# Altium PCB Mini-Rambo.PcbDoc (part 1 of 3)
Units mil, origin at the board's own origin, x right, y up, seen from the top; angles counter-clockwise.
Board outline 4133.86 x 2795.28 mil, 4 copper layers (Top, GND, Supply, Bottom), stack 61.811 mil thick; 295 components, 208 nets, 992 pads, 488 vias.
Unrouted connection lines stored in the file: 73.
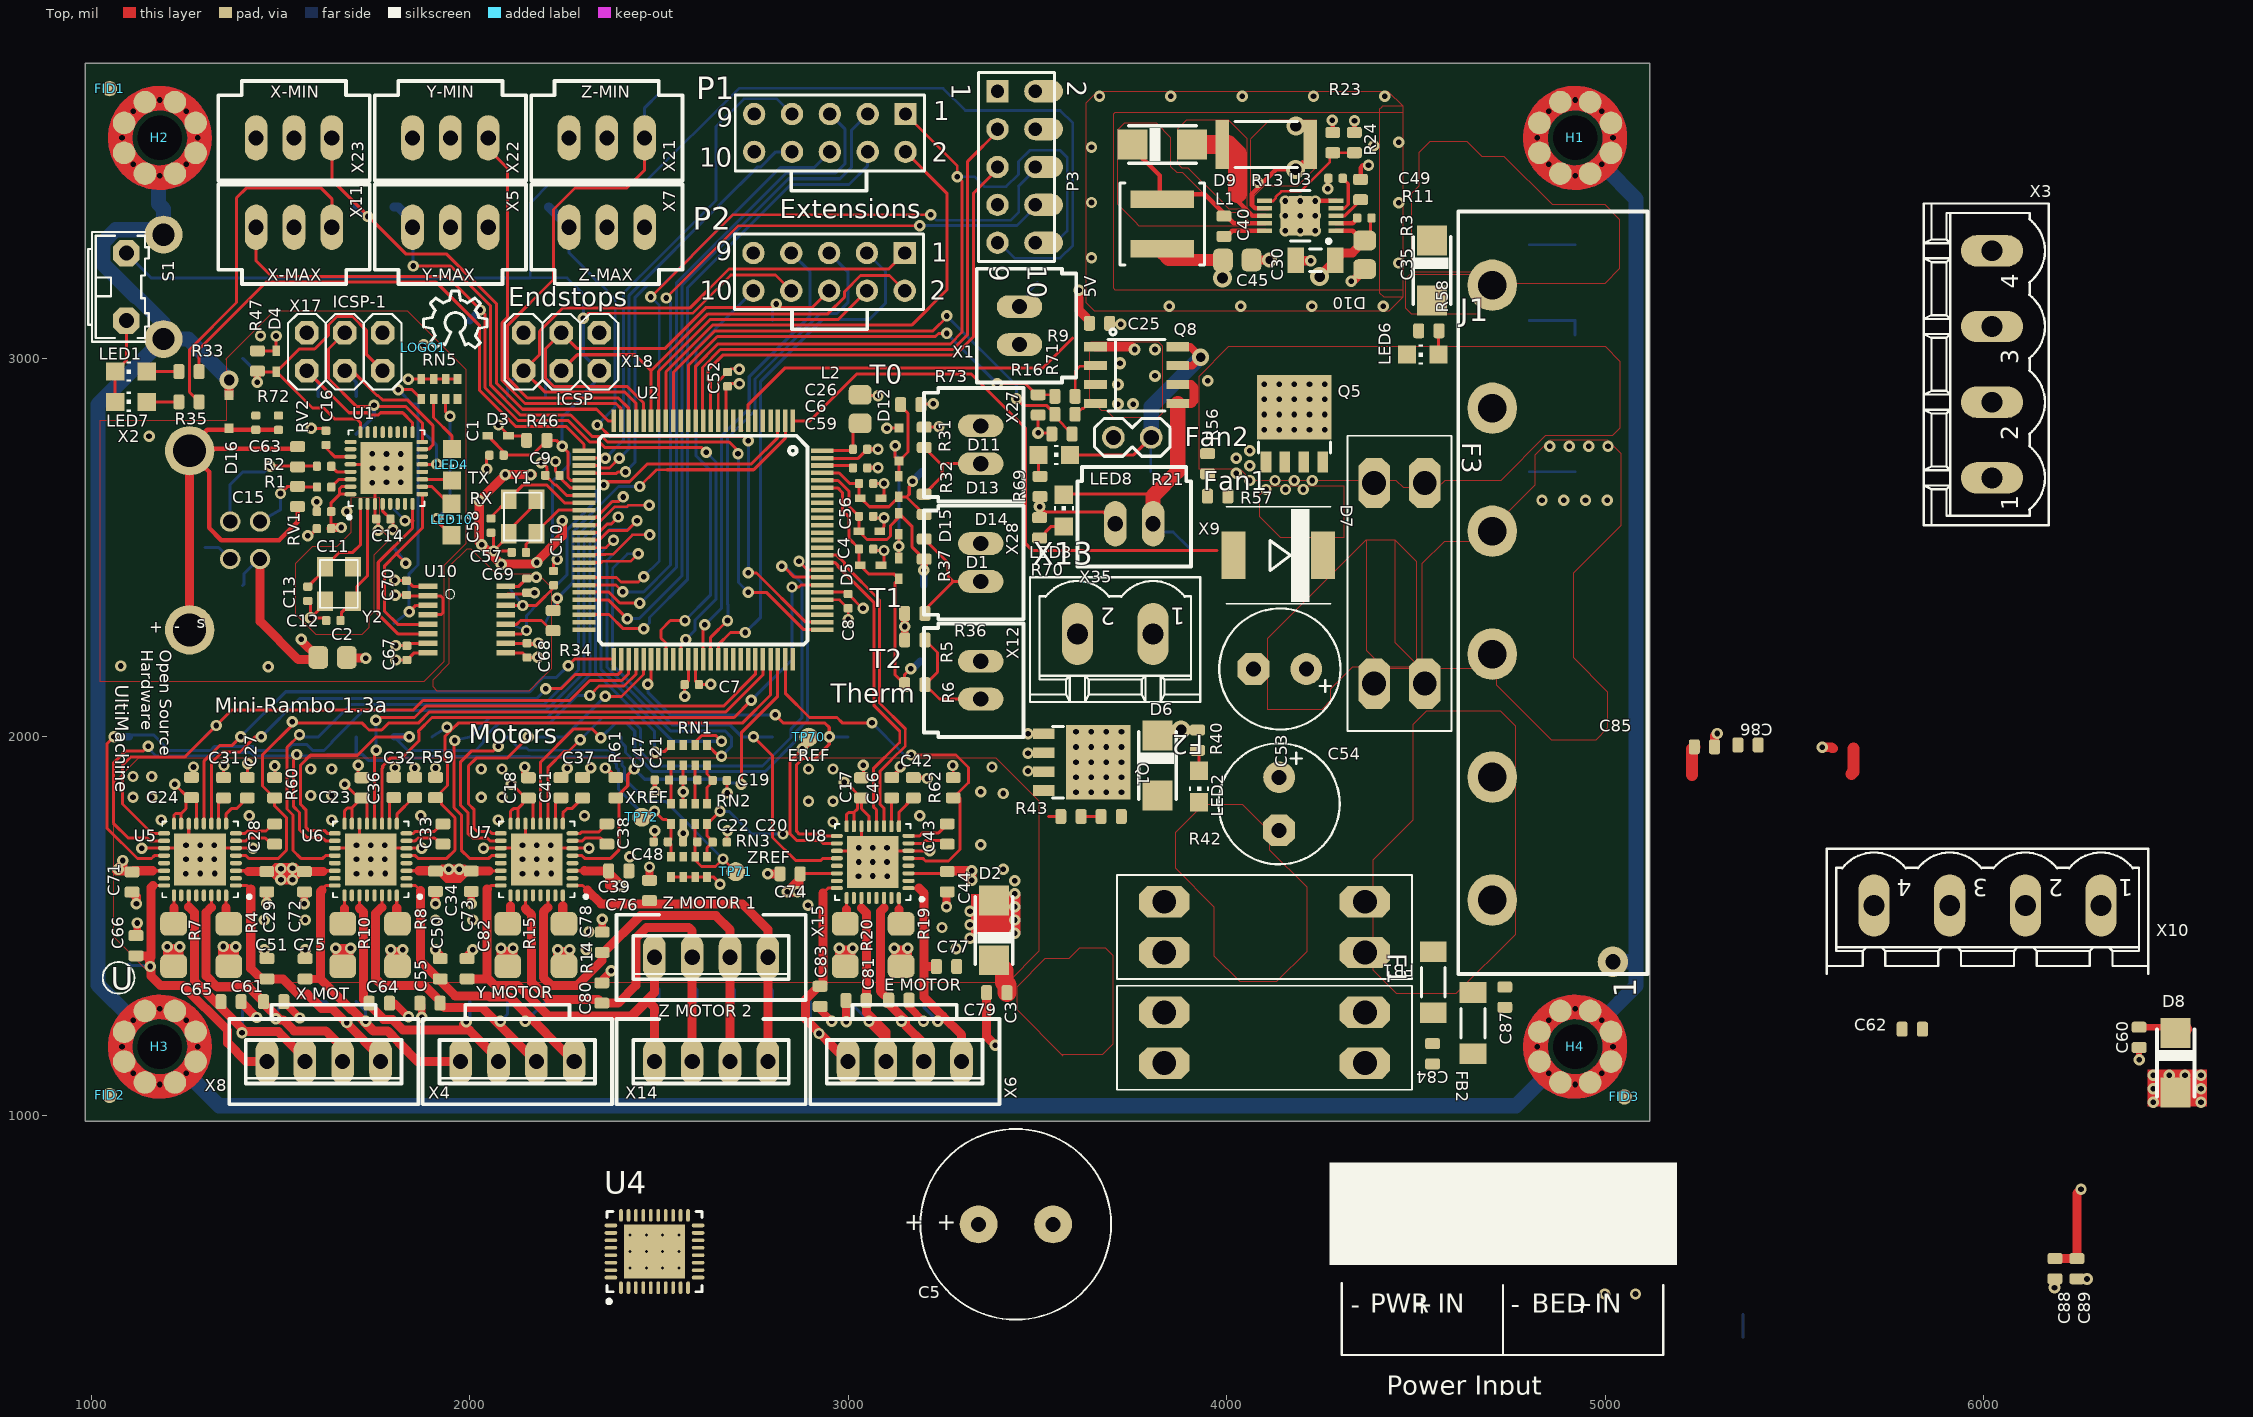
[diagram p0: Top view]
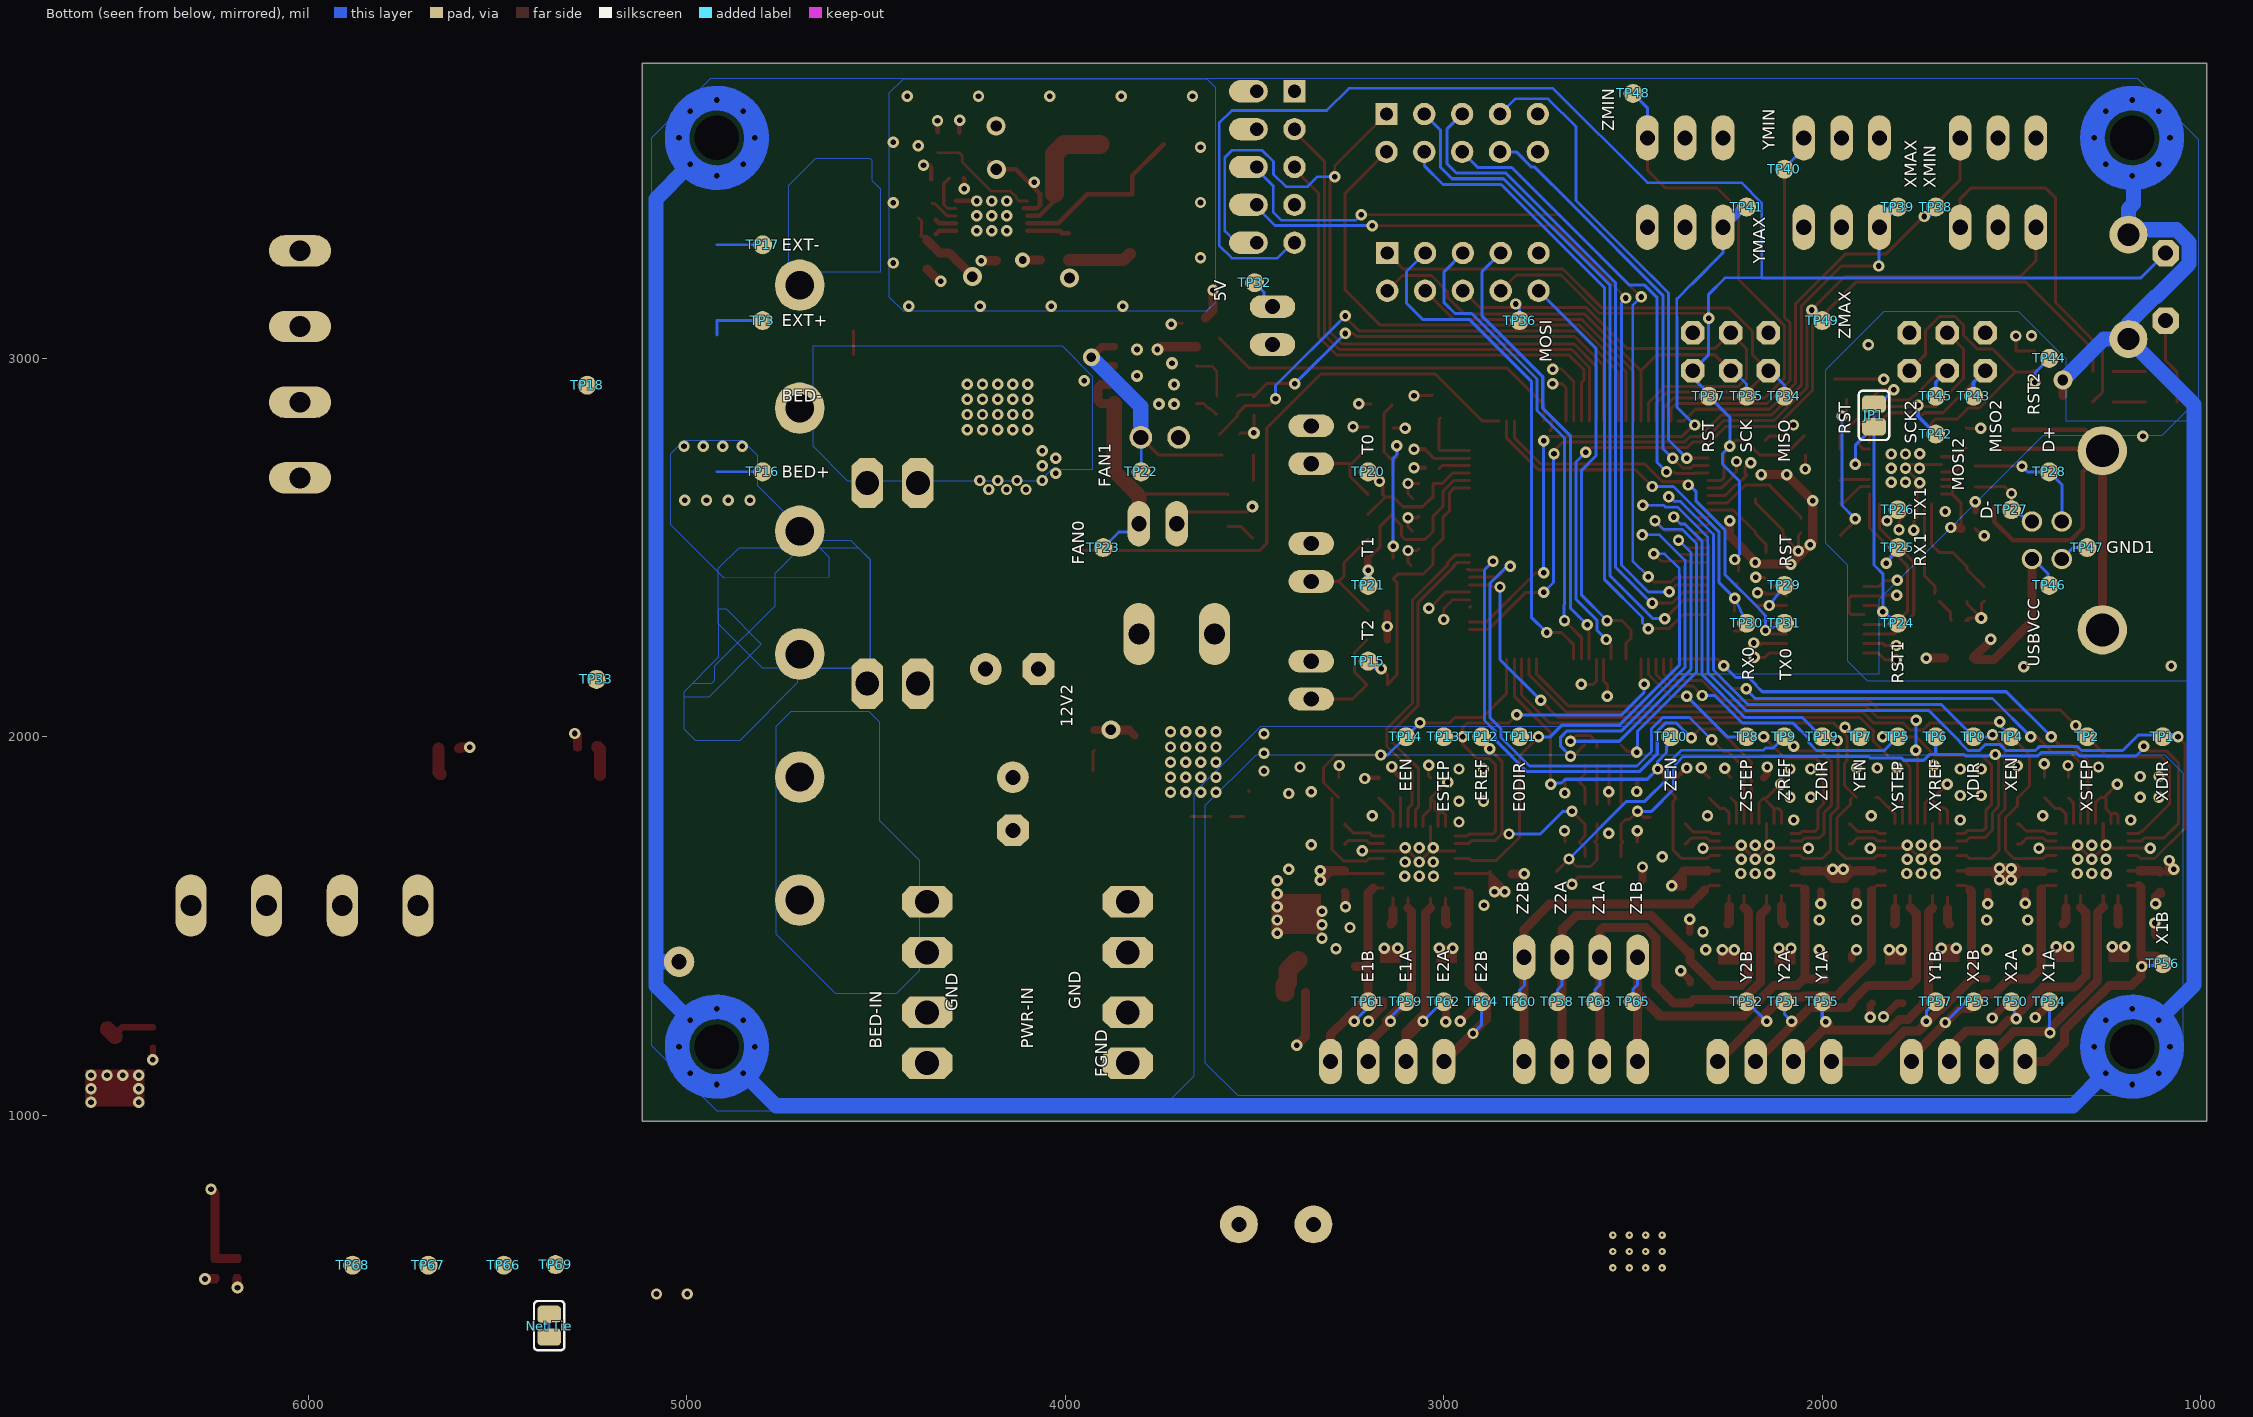
[diagram p1: Bottom view, seen from below]
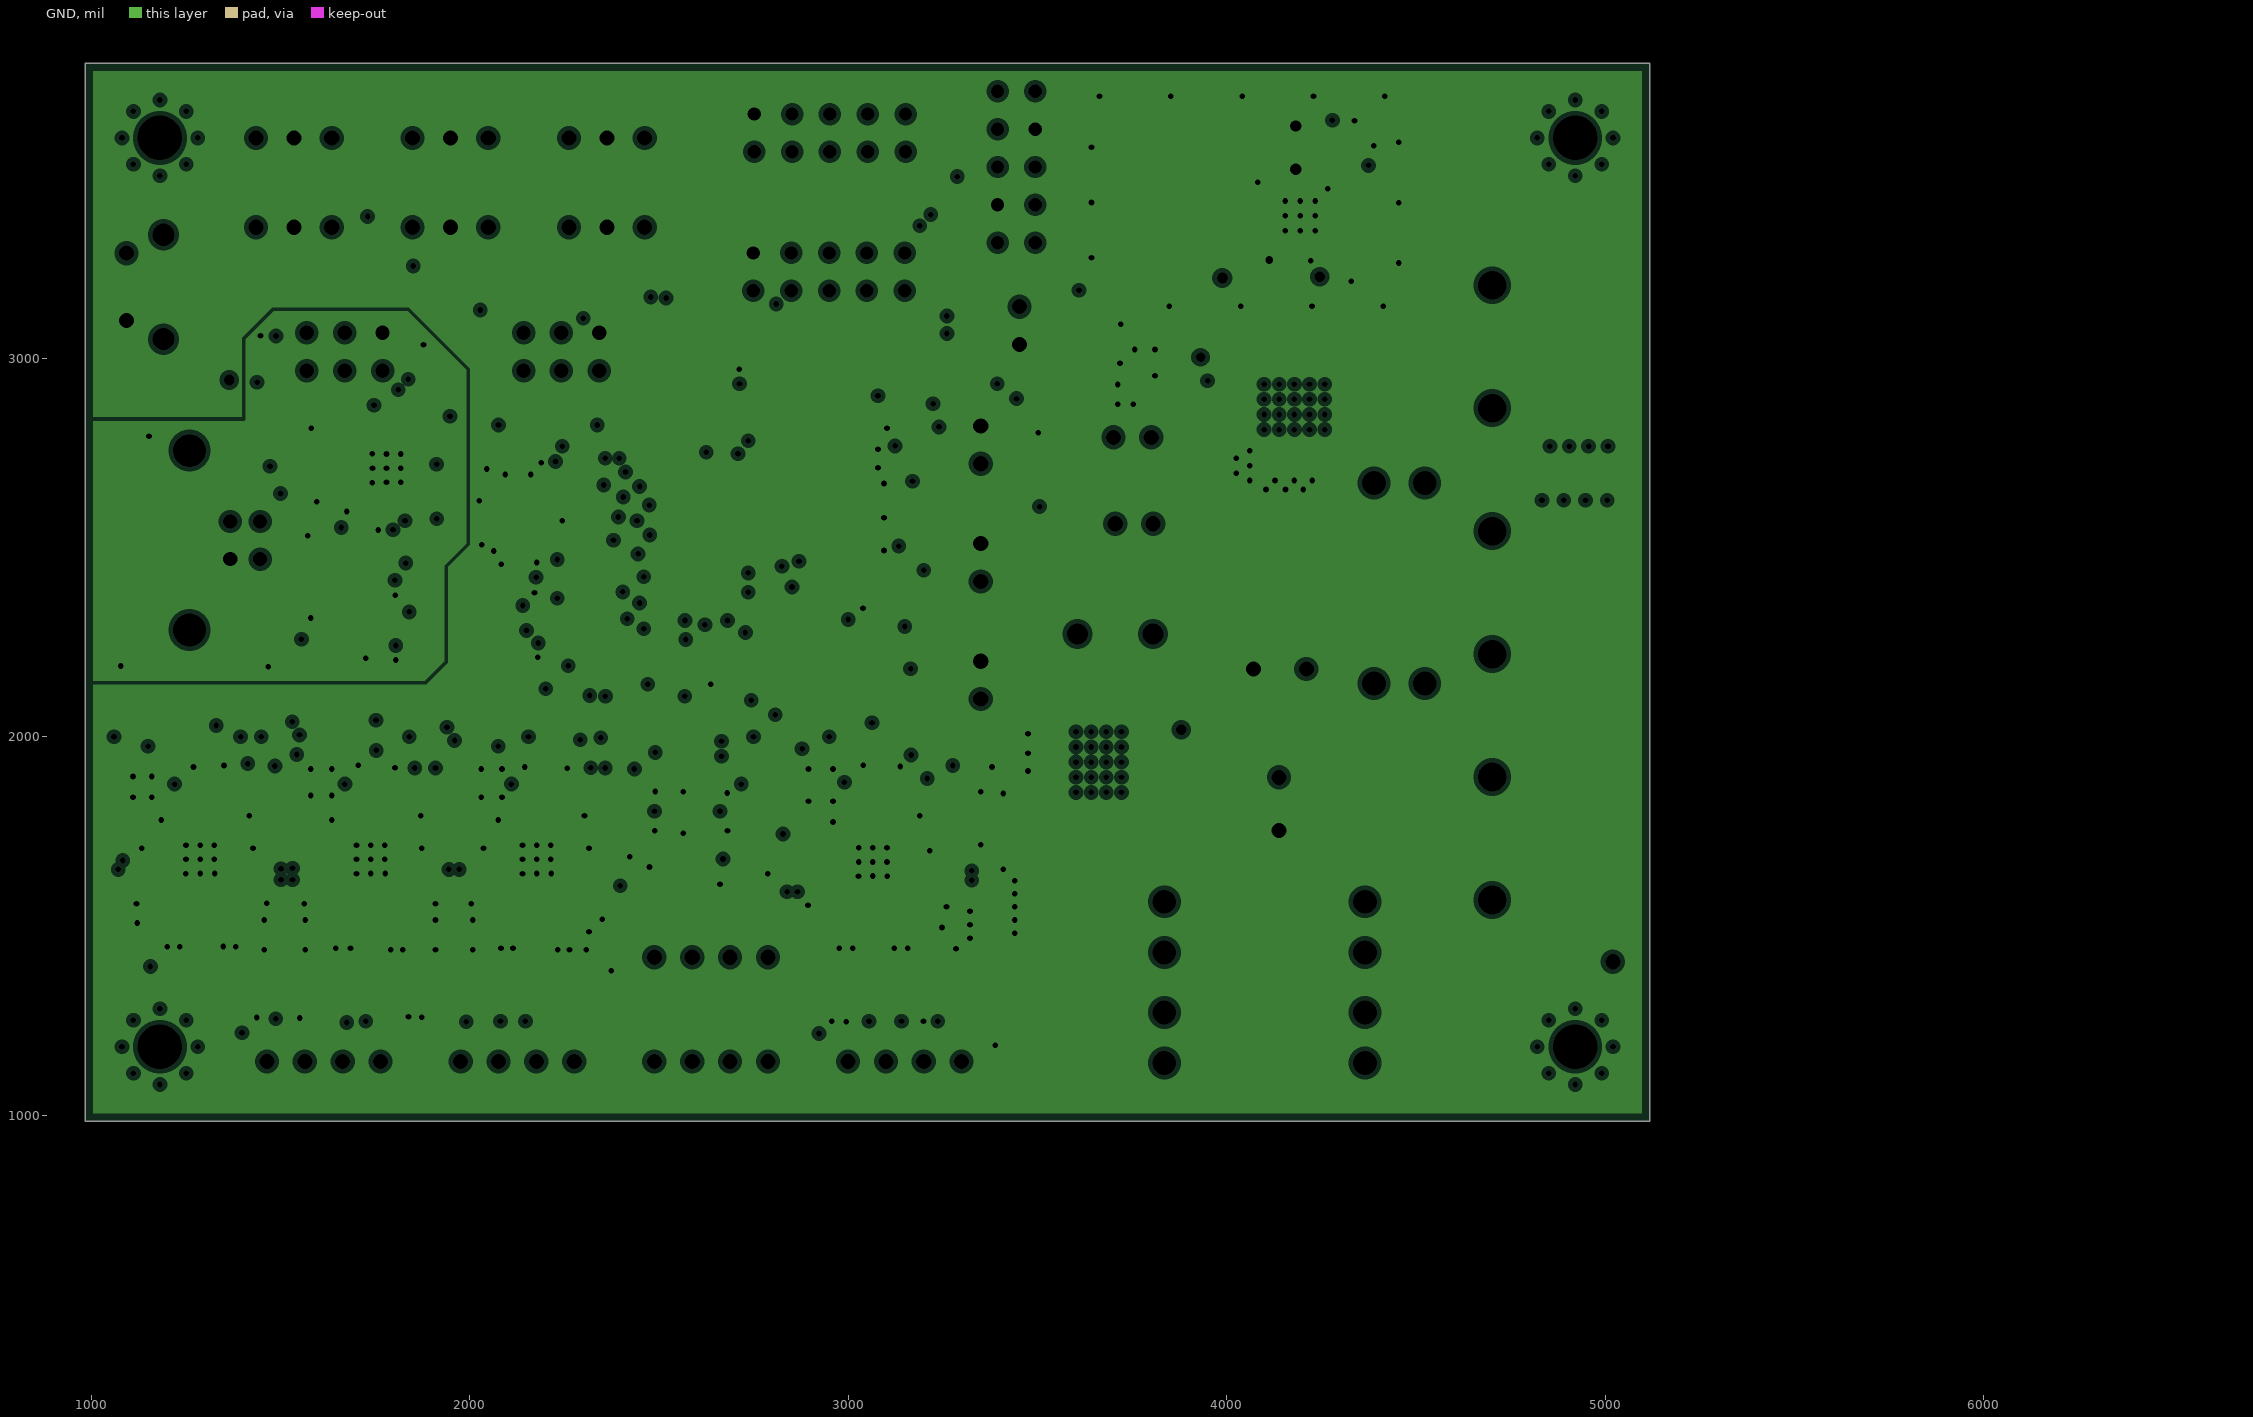
[diagram p2: GND, clearances drawn from the general rule]
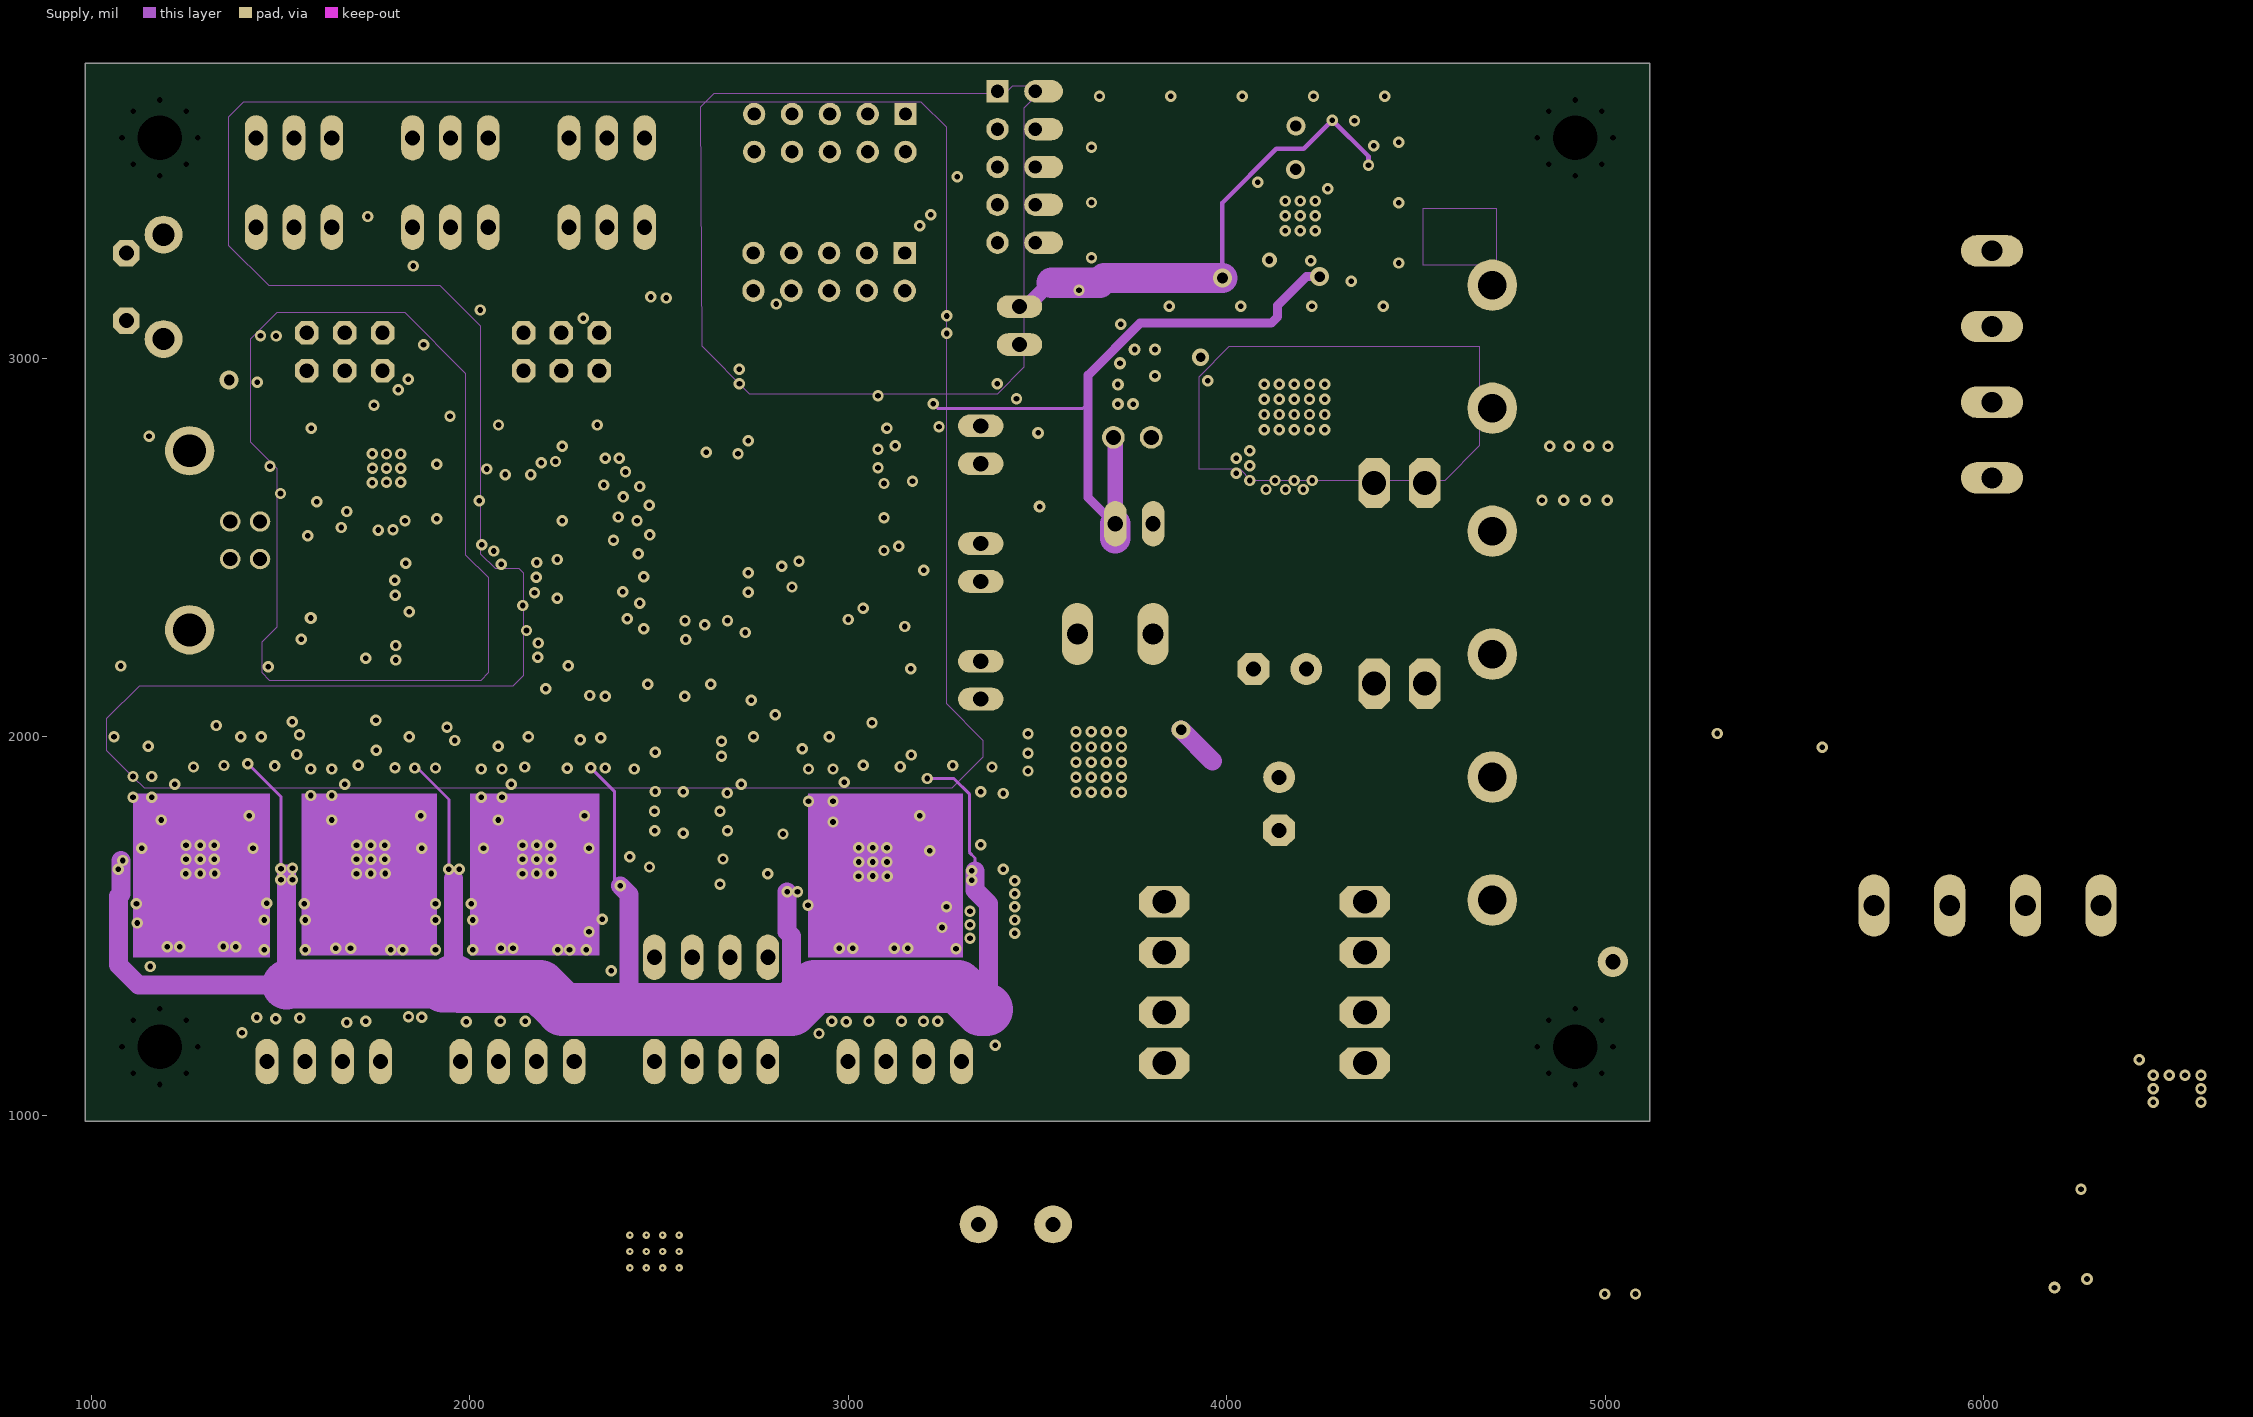
[diagram p3: Supply]

## Layer stack, top to bottom
Top Solder: solder mask 0.4724, Solder Resist, Dk 3.5
Top: signal copper 2.7559
Dielectric 1: prepreg 21.6535, FR-4, Dk 4.3
GND: plane copper 1.378
Dielectric 2: core 10.2362, FR-4, Dk 4.3
Supply: signal copper 1.378
Dielectric 3: prepreg 21.6535, FR-4, Dk 4.3
Bottom: signal copper 2.7559
Bottom Solder: solder mask 0.4724, Solder Resist, Dk 3.5

## Board outline
984.25,984.25 984.25,3779.53 5118.11,3779.53 5118.11,984.25

## Design rules (kind name [scope] priority, off if disabled: settings)
AcuteAngle [All] p1: minimum=6.00000000000000E+0001 checktracksonly=FALSE
Clearance mdViaVia [IsVia vs IsVia] p1: gap=7
Clearance mdPadVia [IsPad vs IsVia] p2: gap=7
Clearance mdPadPad [IsPad vs IsPad] p3: gap=7
Clearance mdWireVia [(InLayerClass('Signal Layers') AND IsTrack) vs IsVia] p4: gap=7
Clearance mdWirePad [(InLayerClass('Signal Layers') AND IsTrack) vs IsPad] p5: gap=7
Clearance mdWireWire [(InLayerClass('Signal Layers') AND IsTrack) vs (InLayerClass('Signal Layers') AND IsTrack)] p6: gap=7
Clearance [All] p7: gap=7
ComponentClearance ComponentClearance_Connectors [InComponentClass('Connectors')] p1: gap=1 collisioncheckmode=3 verticalgap=10 showdistances=FALSE
ComponentClearance [All] p2: gap=10 collisioncheckmode=3 verticalgap=10 showdistances=FALSE
HoleSize [All] p1: absolutevalues=TRUE maxlimit=100000 minlimit=15 maxpercent=80.000 minpercent=20.000
HoleToHoleClearance [All] p1: gap=8 allowstackedmicrovias=TRUE
MinimumAnnularRing [All] p1: minimumring=7
MinimumSolderMaskSliver [All] p1: minsoldermaskwidth=4
PasteMaskExpansion [All] p1: expansion=-1
PlaneClearance [All] p1: clearance=12
PlaneConnect PowerPlaneConnect [InNet('+12V')] p1: planeconnectstyle=Relief reliefexpansion=20 reliefentries=4 reliefconductorwidth=24 reliefairgap=10
PlaneConnect PlaneConnect_Via [IsVia] p2: planeconnectstyle=Direct reliefexpansion=20 reliefentries=4 reliefconductorwidth=10 reliefairgap=10
PlaneConnect [All] p3: planeconnectstyle=Relief reliefexpansion=20 reliefentries=4 reliefconductorwidth=10 reliefairgap=10
PolygonConnect ThermalVias [IsVia] p1: connectstyle=Direct reliefconductorwidth=10 reliefentries=4 polygonreliefangle="90 Angle" airgapwidth=10
PolygonConnect PolygonConnect_no_connect [InNet('+12V2') and OnLayer('Top')  and InComponent('F2')] p2: connectstyle=NoConnect reliefconductorwidth=24 reliefentries=4 polygonreliefangle="90 Angle" airgapwidth=10
PolygonConnect "Direct Connect" [InComponent('R13')  Or InComponent('D9') Or InComponent('L1') Or InComponent('C45') Or InComponent('U3') Or InComponent('C35') Or InComponent('R24') Or InComponent('D2') Or InComponent('D7') Or InComponent('D8') Or InComponent('Q1') Or InComponent('Q5') Or InComponent('D6') Or InComponent('D10') Or InComponent('C40')     Or InComponent('D8')  Or InComponent('F5')] p3: connectstyle=Direct reliefconductorwidth=10 reliefentries=4 polygonreliefangle="90 Angle" airgapwidth=10
PolygonConnect "PolygonConnect_24 mil" [InNet('NetD6_A') OR  InNet('+12V2') OR InComponent('C54')    OR InComponent('Q8') OR InNet('PWR-IN')] p4: connectstyle=Relief reliefconductorwidth=24 reliefentries=4 polygonreliefangle="90 Angle" airgapwidth=10
PolygonConnect "PolygonConnect_Bot 50mil" [InNet('+12V3') Or InNet('NetF3_1') Or InComponent('X10') vs OnLayer('Bottom')] p5: connectstyle=Relief reliefconductorwidth=50 reliefentries=4 polygonreliefangle="90 Angle" airgapwidth=10
PolygonConnect PolygonConnect_50mil [InNet('Netd10_a')] p6: connectstyle=Relief reliefconductorwidth=50 reliefentries=4 polygonreliefangle="90 Angle" airgapwidth=10
PolygonConnect PolygonConnect_Fets_12V-INbot [InNet('12V-IN')] p7: connectstyle=Relief reliefconductorwidth=24 reliefentries=4 polygonreliefangle="90 Angle" airgapwidth=10
PolygonConnect [All] p8: connectstyle=Relief reliefconductorwidth=10 reliefentries=4 polygonreliefangle="90 Angle" airgapwidth=10
RoutingVias [All] p1: holewidth=15 width=30 viastyle="Through Hole" minholewidth=15 minwidth=30 maxholewidth=28 maxwidth=50
SMDToCorner [All] p1: distance=30000
SilkToSilkClearance [All] p1 off: silktosilkclearance=10
SilkToSolderMaskClearance [IsPad] p1 off: minsilkscreentomaskgap=10 clearancetoexposedcopper=TRUE
SolderMaskExpansion ViaTent [(IsVia)  And (HoleDiameter < 0.635   )] p1: expansion=-50
SolderMaskExpansion SolderMaskExpansion_Via [IsVia] p2: expansion=-16
SolderMaskExpansion [All] p3: expansion=3
Width [All] p1: maxlimit=250 minlimit=7 preferedwidth=24 toplayer_prefwidth=8 midlayer1_minwidth=8 bottomlayer_prefwidth=8 minimp=50.000000 maximp=50.000000 favimp=50.000000
21 further rules are at their usual default settings.

## Classes and differential pairs
component class Motors: C5 C17 C18 C23 C24 C27 C28 C29 C31 C32 C33 C34 C36 C37 C38 C39 C41 C42 C43 C44 C46 C50 C51 C55 C61 C64 C65 C66 C71 C72 C73 C74 C75 C76 C77 C78 C79 C80 C81 C82 C83 R4 R7 R8 R10 R14 R15 R19 R20 R59 R60 R61 R62 TP0 TP1 TP2 TP4 TP5 TP6 TP7 TP8 TP9 TP10 TP11 TP12 TP13 TP14 TP19 TP50 TP51 TP52 TP53 TP54 TP55 TP56 TP57 TP58 TP59 TP60 TP61 TP62 TP63 TP64 TP65 U4 U5 U6 U7 U8 X4 X6 X8 X14 X15
component class Power-SMPS: C3 C25 C30 C35 C40 C45 C49 C53 C54 C60 C62 C84 C85 C86 C87 C88 C89 D2 D7 D8 D9 F1 F2 F3 FB1 FB2 H1 H2 H3 H4 J1 L1 "Net Tie" R3 R11 R13 R23 R24 TP32 TP66 TP67 TP68 TP69 U3 X1 X10 X16

## Components (designator, comment, footprint, x,y, rotation, side; value= is the part's Value field where it differs from the comment)
C1 "22pF" C0402 2070.87,2744.09 r180 top
C2 "10uF" C0805 1637.8,2209.65 r180 top
C3 "100nF" C0603 3392.72,1323.82 r180 top
C4 "100nF" C0402 3047.24,2496.06 r0 top
C5 "470uF" C12,5-5 3442.91,711.61 r0 top
C6 "100nF" C0402 3031.5,2710.63 r0 top
C7 "100nF" C0402 2586.61,2137.8 r0 top
C8 "100nF" C0402 3000,2358.27 r90 top
C9 "100nF" C0402 2218.5,2690.94 r180 top
C10 "100nF" C0402 2221.46,2419.29 r90 top
C11 "100nF" C0402 1615,2550 r180 top
C12 "22pF" C0402 1639.76,2307.09 r180 top
C13 "22pF" C0402 1571.85,2377.95 r270 top
C14 "100nF" C0402 1771.65,2575.79 r180 top
C15 "100nF" C0402 1615,2595 r180 top
C16 "1uF" C0402 1620,2790 r90 top
C17 "100nF" C0603 3035,1865 r90 top
C18 "100nF" C0603 2155,1865 r90 top
C19 "1uF" C0402 2660.43,1884.84 r0 top
C20 "1uF" C0402 2660.43,1721.46 r0 top
C21 "1uF" C0402 2582.68,1885.83 r180 top
C22 "1uF" C0402 2582.68,1722.44 r180 top
C23 "100nF" C0603 1715,1865 r90 top
C24 "100nF" C0603 1264.76,1866.14 r90 top
C25 "100nF" C0603 3664.37,3092.52 r0 top
C26 "100nF" C0402 3031.5,2759.84 r0 top
C27 "100nF" C0603 1412.06,1865.33 r270 top
C28 "100nF" C0603 1484.25,1743.11 r90 top
C29 "100nF" C0603 1463.58,1617.13 r270 top
C30 "4.7uF" C1206 4235,3259 r180 top
C31 "220nF" C0603 1349.42,1865.33 r270 top
C32 "100nF" C0603 1854.33,1866.14 r270 top
C33 "100nF" C0603 1929.13,1743.11 r90 top
C34 "100nF" C0603 1909.45,1618.11 r270 top
C35 "1uF" C0805 4365,3274 r270 top
C36 "220nF" C0603 1799.21,1866.14 r270 top
C37 "100nF" C0603 2298.23,1865.16 r270 top
C38 "100nF" C0603 2362.2,1743.11 r90 top
C39 "100nF" C0603 2393.7,1645.67 r0 top
C40 "100nF" C0603 3993,3349 r90 top
C41 "220nF" C0603 2241.14,1865.16 r270 top
C42 "100nF" C0603 3172.24,1865.33 r270 top
C43 "100nF" C0603 3261.81,1743.11 r90 top
C44 "100nF" C0603 3261.81,1617.13 r270 top
C45 "10uF" C0805 4028,3260 r0 top
C46 "220nF" C0603 3115.16,1865.33 r270 top
C47 "1uF" C0402 2507.87,1885.83 r180 top
C48 "1uF" C0402 2504.92,1722.44 r180 top
C49 "4.7nF" C0402 4288,3476 r180 top
C50 "1nF" C0603 1922,1387 r90 top
C51 "1nF" C0603 1464,1387 r90 top
C52 "100nF" C0402 2681.1,2944.88 r90 top
C53 "100uF" C3,5-8 4140.75,2179.13 r180 top
C54 "100uF" C3,5-8 4138.78,1822.83 r270 top
C55 "1nF" C0603 1894.77,1296 r180 top
C56 "100nF" C0402 3047.24,2582.68 r0 top
C57 "22pF" C0402 2129.92,2487.2 r180 top
C58 "22pF" C0402 2056.1,2558.07 r270 top
C59 "100nF" C0402 3047.24,2669.29 r0 top
C60 "100nF" C0603 6411.42,1205.71 r270 top
C61 "1nF" C0603 1481.75,1300 r0 top
C62 "100nF" C0603 5812.01,1227.36 r0 top
C63 "4.7nF" C0402 1434.53,2830 r90 top
C64 "1nF" C0603 1761,1296 r0 top
C65 "1nF" C0603 1369,1300 r0 top
C66 "1nF" C0603 1118,1448 r90 top
C67 "100nF" C0402 1833.66,2221.46 r90 top
C68 "100nF" C0402 2151.57,2228.35 r90 top
C69 "100nF" C0402 2150.59,2399.61 r270 top
C70 "100nF" C0402 1832.68,2393.7 r270 top
C71 "100nF" C0603 1107.24,1616.26 r270 top
C72 "100nF" C0603 1562.99,1617.13 r270 top
C73 "100nF" C0603 2003.94,1618.11 r270 top
C74 "100nF" C0603 2846.46,1637.8 r180 top
C75 "1nF" C0603 1565,1387 r90 top
C76 "1nF" C0603 2475,1594 r90 top
C77 "1nF" C0603 3260,1393 r0 top
C78 "1nF" C0603 2350,1457 r90 top
C79 "1nF" C0603 3134,1304 r0 top
C80 "1nF" C0603 2349,1323 r90 top
C81 "1nF" C0603 3021,1303 r180 top
C82 "1nF" C0603 1993,1387 r90 top
C83 "1nF" C0603 2926,1314 r270 top
C84 "NP" C0603 4544.29,1162.4 r270 top
C85 "NP" C0603 5262.8,1973.43 r0 top
C86 "NP" C0603 5377.95,1978.35 r180 top
C87 "NP" C0603 4735.24,1312.01 r270 top
C88 "NP" C0603 6188.98,594.49 r270 top
C89 "NP" C0603 6247.05,594.49 r270 top
D1 "1N4148WT" SOD523 3133.86,2444.88 r270 top
D2 "SMAJ30A" SMA-SM 3385.83,1488.19 r90 top
D3 "1N4148WT" SOD523 2074.8,2795.28 r180 top
D4 "1N4148WT" SOD523 1489.17,2992.13 r270 top
D5 "1N4148WT" SOD523 3059.06,2452.76 r0 top
D6 "SK310A-TP" SMA-SM 3816.93,1924.21 r270 top
D7 "S3A-13-F" DO-214AB 4136.81,2479.33 r180 top
D8 "SMAJ30A" SMA-SM 6507.87,1138.78 r270 top
D9 "SK310A-TP" SMA-SM 3830,3565 r0 top
D10 "SK310A-TP" SMA-SM 4542.32,3232.28 r270 top
D11 "1N4148WT" SOD523 3133.86,2661.42 r270 top
D12 "SZMM3Z4V7T1G" SOD323-R 3133.86,2771.65 r90 top
D13 "1N4148WT" SOD523 3059.06,2629.92 r0 top
D14 "1N4148WT" SOD523 3133.86,2562.99 r90 top
D15 "1N4148WT" SOD523 3056.1,2543.31 r0 top
D16 "RSB39VTE-17" SOD323-R 1364.17,2859.25 r270 top
F1 "3557-2" 3557 4100.39,1204.72 r180 top
F2 "3557-2" 3557 4100.39,1497.05 r180 top
F3 "3557-2" 3557 4456.69,2405.51 r90 top
FB1 "BLM41PG600SN1L" L1806 4546.26,1351.38 r270 top
FB2 "BLM41PG600SN1L" L1806 4651.57,1243.11 r270 top
FID1 "FIDUCIAL" FIDUCIAL-1X2 1048.23,3712.6 r0 top
FID2 "FIDUCIAL" FIDUCIAL-1X2 1048.23,1052.17 r0 top
FID3 "FIDUCIAL" FIDUCIAL-1X2 5051.18,1048.23 r0 top
H1 "Hole" Wave_hole_3x7-singleSided 4921.26,3582.68 r0 top
H2 "Hole" Wave_hole_3x7-singleSided 1181.1,3582.68 r0 top
H3 "Hole" Wave_hole_3x7-singleSided 1181.1,1181.1 r0 top
H4 "Hole" Wave_hole_3x7-singleSided 4921.26,1181.1 r0 top
J1 "2-1437667-9" CON-Barrier-6-8.26mm 4862.2,2380.91 r90 top
JP1 "SJ" SJ 1863.19,2849.41 r270 bottom
L1 "XAL5050-153MED" XAL50XX-153 3830,3355 r270 top
L2 "CBC2012T100M" C0805 3031.5,2866.14 r270 top
LED1 "5988140107F" LED2012120 1105,2965 r180 top
LED2 "5988110107F" LED2012120 3927.17,1869.09 r270 top
LED3 "5988110107F" LED2012120 3569.88,2597.44 r90 top
LED4 "5988140107F" LED2012120 1952.76,2719.49 r270 top
LED6 "5988110107F" LED2012120 4518.7,3009.84 r180 top
LED7 "5988170107F" LED2012120 1105,2885 r180 top
LED8 "5988110107F" LED2012120 3544.29,2745.08 r0 top
LED10 "5988140107F" LED2012120 1951.77,2573.82 r90 top
LOGO1 "OSHW_LOGO_8MILX0150-NT" OSHW_8X150_NOTEXT 1877.95,3027.56 r0 top
"Net Tie" "NetTie" "NET TIE" 5364.17,443.9 r90 bottom net-tie
P1 "Header 5X2" HDR2X5 3151.57,3645.67 r180 top
P2 "Header 5X2" HDR2X5 3149.61,3278.54 r180 top
P3 "5x2 IDCw" "2X5 IDCW" 3394.68,3705.71 r270 top
Q1 "PSMN7R0-60YS,115" SOT669 3617.13,1933.07 r270 top
Q5 "PSMN7R0-60YS,115" SOT669 4179.13,2826.77 r0 top
Q8 "NCV8402AD" NCV8402AD-SOIC8 3761.81,2955.71 r270 top
R1 "22r" R0402 1615,2660 r0 top
R2 "22r" R0402 1615,2715 r0 top
R3 "200K" R0402 4364,3371 r0 top
R4 "0.1r" R1206 1363.19,1449.8 r270 top
R5 "4.7K" R0603 3176.18,2255.91 r180 top
R6 "4.7K" R0603 3176.17,2137.8 r0 top
R7 "0.1r" R1206 1217.52,1449.8 r270 top
R8 "0.1r" R1206 1809.06,1449.8 r270 top
R9 "10r" R0603 3572.83,2899.61 r0 top
R10 "0.1r" R1206 1664.37,1449.8 r270 top
R11 "10K" R0603 4354,3446 r90 top
R13 "0.6r" 2512R-0.55 4105,3565 r180 top
R14 "0.1r" R1206 2249.02,1449.8 r270 top
R15 "0.1r" R1206 2100.39,1449.8 r270 top
R16 "100K" R0603 3501.97,2876.97 r270 top
R19 "0.1r" R1206 3139.76,1449.8 r270 top
R20 "0.1r" R1206 2992.13,1449.8 r270 top
R21 "100K" R0603 3564.96,2800.2 r180 top
R23 "10K" R0603 4280.54,3570.17 r270 top
R24 "10K" R0603 4337.63,3570.17 r90 top
R31 "4.7K" R0603 3200.79,2791.34 r90 top
R32 "4.7K" R0603 3200.79,2614.17 r90 top
R33 "1K" R0603 1258,2965 r180 top
R34 "1K" R0603 2220.47,2307.09 r90 top
R35 "1K" R0603 1258,2885 r180 top
R36 "4.7K" R0603 3176.18,2325.79 r180 top
R37 "4.7K" R0603 3200.79,2496.06 r90 top
R40 "1.8K" R0603 3923.23,1991.14 r90 top
R42 "10r" R0603 3694.88,1789.37 r0 top
R43 "100K" R0603 3588.58,1789.37 r180 top
R46 "10K" R0603 2177.17,2783.46 r180 top
R47 "10K" R0603 1438.98,2993.11 r90 top
R56 "10r" R0603 3949.8,2721.46 r90 top
R57 "100K" R0603 3976.38,2635.83 r0 top
R58 "1.8K" R0603 4534.45,3072.83 r180 top
R59 "100K" R0603 1909.45,1866.14 r270 top
R60 "100K" R0603 1484.25,1865.16 r270 top
R61 "100K" R0603 2385.83,1865.33 r270 top
R62 "100K" R0603 3277.56,1865.33 r270 top
R69 "1.8K" R0603 3506.89,2661.42 r270 top
R70 "1.8K" R0603 3505.91,2552.17 r90 top
R71 "10r" R0603 3572.83,2852.36 r0 top
R72 "1M" R0402 1494.53,2830.01 r270 top
R73 "10K" R0603 3165.35,2877.95 r0 top
RN1 "10K" CAY16 2579.72,1951.77 r180 top
RN2 "10K" CAY16 2579.72,1796.26 r180 top
RN3 "10K" CAY16 2579.72,1656.5 r180 top
RN5 "1K" CAY16 1920.28,2919.29 r180 top
RV1 "CG0603MLC-05E" R0603 1545,2635 r90 top
RV2 "CG0603MLC-05E" R0603 1545,2740 r270 top
S1 "1571610-2" B3F-31XX 1141.73,3188.98 r270 top
TP0 "TestPoint" TP1-27 1600,2000 r180 bottom
TP1 "TestPoint" TP1-27 1100,2000 r180 bottom
TP2 "TestPoint" TP1-27 1300,2000 r180 bottom
TP3 "TestPoint" TP1-27 4800,3100 r180 bottom
TP4 "TestPoint" TP1-27 1500,2000 r180 bottom
TP5 "TestPoint" TP1-27 1800,2000 r180 bottom
TP6 "TestPoint" TP1-27 1700,2000 r180 bottom
TP7 "TestPoint" TP1-27 1900,2000 r180 bottom
TP8 "TestPoint" TP1-27 2200,2000 r180 bottom
TP9 "TestPoint" TP1-27 2100,2000 r180 bottom
TP10 "TestPoint" TP1-27 2400,2000 r180 bottom
TP11 "TestPoint" TP1-27 2800,2000 r180 bottom
TP12 "TestPoint" TP1-27 2900,2000 r180 bottom
TP13 "TestPoint" TP1-27 3000,2000 r180 bottom
TP14 "TestPoint" TP1-27 3100,2000 r180 bottom
TP15 "TestPoint" TP1-27 3200,2200 r90 bottom
TP16 "TestPoint" TP1-27 4800,2700 r180 bottom
TP17 "TestPoint" TP1-27 4800,3300 r180 bottom
TP18 "TestPoint" TP1-27 5263.78,2929.13 r180 bottom
TP19 "TestPoint" TP1-27 2000,2000 r180 bottom
TP20 "TestPoint" TP1-27 3200,2700 r180 bottom
TP21 "TestPoint" TP1-27 3200,2400 r180 bottom
TP22 "TestPoint" TP1-27 3800,2700 r180 bottom
TP23 "TestPoint" TP1-27 3900,2500 r180 bottom
TP24 "TestPoint" TP1-27 1800,2300 r180 bottom
TP25 "TestPoint" TP1-27 1800,2500 r180 bottom
TP26 "TestPoint" TP1-27 1800,2600 r180 bottom
TP27 "TestPoint" TP1-27 1500,2600 r180 bottom
TP28 "TestPoint" TP1-27 1400,2700 r180 bottom
TP29 "TestPoint" TP1-27 2100,2400 r180 bottom
TP30 "TestPoint" TP1-27 2200,2300 r180 bottom
TP31 "TestPoint" TP1-27 2100,2300 r180 bottom
TP32 "TestPoint" TP1-27 3500,3200 r90 bottom
TP33 "TestPoint" TP1-27 5239.17,2151.57 r180 bottom
TP34 "TestPoint" TP1-27 2100,2900 r180 bottom
TP35 "TestPoint" TP1-27 2200,2900 r180 bottom
TP36 "TestPoint" TP1-27 2800,3100 r180 bottom
TP37 "TestPoint" TP1-27 2300,2900 r180 bottom
TP38 "TestPoint" TP1-27 1700,3400 r180 bottom
TP39 "TestPoint" TP1-27 1800,3400 r180 bottom
TP40 "TestPoint" TP1-27 2100,3500 r180 bottom
TP41 "TestPoint" TP1-27 2200,3400 r180 bottom
TP42 "TestPoint" TP1-27 1700,2800 r180 bottom
TP43 "TestPoint" TP1-27 1600,2900 r180 bottom
TP44 "TestPoint" TP1-27 1400,3000 r180 bottom
TP45 "TestPoint" TP1-27 1700,2900 r180 bottom
TP46 "TestPoint" TP1-27 1400,2400 r180 bottom
TP47 "TestPoint" TP1-27 1300,2500 r180 bottom
TP48 "TestPoint" TP1-27 2500,3700 r180 bottom
TP49 "TestPoint" TP1-27 2000,3100 r180 bottom
TP50 "TestPoint" TP1-27 1500,1300 r180 bottom
TP51 "TestPoint" TP1-27 2100,1300 r180 bottom
TP52 "TestPoint" TP1-27 2200,1300 r180 bottom
TP53 "TestPoint" TP1-27 1600,1300 r180 bottom
TP54 "TestPoint" TP1-27 1400,1300 r180 bottom
TP55 "TestPoint" TP1-27 2000,1300 r180 bottom
TP56 "TestPoint" TP1-27 1100,1400 r180 bottom
TP57 "TestPoint" TP1-27 1700,1300 r180 bottom
TP58 "TestPoint" TP1-27 2700,1300 r180 bottom
TP59 "TestPoint" TP1-27 3100,1300 r180 bottom
TP60 "TestPoint" TP1-27 2800,1300 r180 bottom
TP61 "TestPoint" TP1-27 3200,1300 r180 bottom
TP62 "TestPoint" TP1-27 3000,1300 r180 bottom
TP63 "TestPoint" TP1-27 2600,1300 r180 bottom
TP64 "TestPoint" TP1-27 2900,1300 r180 bottom
TP65 "TestPoint" TP1-27 2500,1300 r180 bottom
TP66 "TestPoint" TP1-27 5483.86,603.74 r180 bottom
TP67 "TestPoint" TP1-27 5683.86,603.74 r180 bottom
TP68 "TestPoint" TP1-27 5883.86,603.74 r180 bottom
TP69 "TestPoint" TP1-27 5347.44,605.32 r180 bottom
TP70 "TestPoint" TP1-27 2895.67,1999.02 r90 top
TP71 "TestPoint" TP1-27 2702.76,1643.7 r90 top
TP72 "TestPoint" TP1-27 2454.72,1787.4 r90 top
U1 "Atmega32u2" QFN32_050050 1780,2710 r90 top
U2 "Atmega2560" TQFP100_140140_012 2616.79,2520 r270 top
U3 "LM25011MY/NOPB" VSSOP10 4194.69,3376.57 r180 top
U4 "TMC2130-LA" QFN36-50P500X600X900_HS-37N 2488.19,639.76 r90 top
U5 "A4982" QFN32_050050 1287.4,1676.01 r180 top
U6 "A4982" QFN32_050050 1738.31,1676.01 r180 top
U7 "A4982" QFN32_050050 2176.93,1676.01 r180 top
U8 "A4982" QFN32_050050 3064.96,1669.12 r180 top
U10 "ADUM7441" QSOP16 1992.13,2310.04 r270 top
X1 "C-GRID-02-70543" 70543-02 3452.76,3086.61 r90 top
X2 "USB-B" PN61729 1259.84,2519.68 r270 top
X3 "0395311004" MSTBV4 6022.64,2984.25 r90 top
X4 "MPT4" 4POL254 2125.98,1141.73 r180 top
X5 "C-GRID-03-70543" 70543-03 1948.82,3346.46 r0 top
X6 "MPT4" 4POL254 3149.61,1141.73 r180 top
X7 "C-GRID-03-70543" 70543-03 2362.2,3346.46 r0 top
X8 "MPT4" 4POL254 1614.17,1141.73 r180 top
X9 "C-GRID-02-70543" 70543-02 3755.91,2562.99 r180 top
X10 "0395311004" MSTBV4-ThinSilk 6010.83,1554.13 r180 top
X11 "C-GRID-03-70543" 70543-03 1535.43,3346.46 r0 top
X12 "C-GRID-02-70543" 70543-02 3350.39,2149.61 r270 top
X13 "0395311002" MSTBV2 3705.71,2271.65 r180 top
X14 "MPT4" "4POL254 NOPOL" 2637.8,1141.73 r180 top
X15 "MPT4" "4POL254 NOPOL" 2637.8,1417.32 r180 top
X17 "PINHD-2X3" 2X03 1669.53,3017.56 r0 top
X18 "PINHD-2X3" 2X03 2242.13,3017.56 r0 top
X21 "C-GRID-03-70543" 70543-03 2362.2,3582.68 r180 top
X22 "C-GRID-03-70543" 70543-03 1948.82,3582.68 r180 top
X23 "C-GRID-03-70543" 70543-03 1535.43,3582.68 r180 top
X27 "C-GRID-02-70543" 70543-02 3350.39,2771.65 r270 top
X28 "C-GRID-02-70543" 70543-02 3350.39,2460.63 r270 top
X35 "M02PTH" 1X02 3700.79,2791.34 r0 top
Y1 "7M-16.000MEEQ-T" CRYS320250 2140.15,2581.99 r90 top
Y2 "7M-16.000MEEQ-T" CRYS320250 1653.95,2404.12 r270 top

## Footprints (in the part's own frame and the unit in brackets; to place one, negate y for a bottom-side part, rotate by r counter-clockwise, add the part's x,y. Pads: shape width x height; smd on the part's side, far side on the other; paste and mask are expansions set on the pad)
1X02 [mil]
  round 60 hole 40: 1(0,0) 2(100,0)
  silkscreen extent -50,-50 150,50, body extent -54,-54 154,54, height 336
2X03 [mil]
  oct 62x62 hole 38: 1(-100,-50) 2(-100,50) 3(0,-50) 4(0,50) 5(100,-50) 6(100,50)
  silkscreen extent -150,-100 150,100, body extent -153,-103 153,103, height 336
"2X5 IDCW" [mm]
  rect 1.5x1.5 hole 0.9: 1(0,0)
  oval 1.5x2.6 hole 0.9 copper offset 0,0.55: 2(0,2.54) 4(2.54,2.54) 6(5.08,2.54) 8(7.62,2.54) 10(10.16,2.54)
  round 1.5 hole 0.9: 3(2.54,0) 5(5.08,0) 7(7.62,0) 9(10.16,0)
  silkscreen extent -1.27,-1.27 11.43,3.81, body extent -1.37,-1.37 11.53,3.91, height 12.7
4POL254 [mil]
  oval 60x120 hole 40: 1(-150,0) 2(-50,0) 3(50,0) 4(150,0)
  silkscreen extent -250,-150 250,113, body extent -250,-150 250,113, height 454
"4POL254 NOPOL" [mil]
  oval 60x120 hole 40: 1(-150,0) 2(-50,0) 3(50,0) 4(150,0)
  silkscreen extent -250,-113 250,113, body extent -250,-150 250,113, height 454
2512R-0.55 [mm] "2512 Resistor 6.35mm x 3.2mm x 0.55mm"
  rect 0.9x3.3 smd: 1(-2.95,0) 2(2.95,0)
  silkscreen extent -2.1,-1.55 2.1,1.55, body extent -3.22,-1.68 3.22,1.68, height 0.65
3557 [mil] "3557"
  oct 133x83 hole 63: 1(-265,-67) 1(-265,67) 2(265,-67) 2(265,67)
  silkscreen extent -390,-138 390,138, body extent -392,-140 392,140, height 709
70543-02 [mil]
  oval 60x120 hole 40: 1(-50,0) 2(50,0)
  silkscreen extent -150,-150 150,113, body extent -150,-150 150,113, height 450
70543-03 [mil]
  oval 60x120 hole 40: 1(-100,0) 2(0,0) 3(100,0)
  silkscreen extent -200,-150 200,113, body extent -200,-150 200,113, height 450
B3F-31XX [mil]
  oct 70x70 hole 40: 1(-89,-49) 2(89,-49)
  round 100 hole 59: 3(-138,49) 4(138,49)
  silkscreen extent -145,-150 145,10, body extent -165,-200 165,109, height 303
C3,5-8 [mil]
  round 84 hole 40: 1(-70,0)
  oct 84x84 hole 40: 2(70,0)
  silkscreen extent -160,-160 160,160, body extent -160,-160 160,160, height 512
C12,5-5 [mil]
  round 100 hole 40: 1(-98.43,0) 2(98.43,0)
  silkscreen extent -252,-252 252,252, body extent -252,-252 252,252, height 787
C0402 [mil]
  rrect40% 22x24 smd: 1(-18.7,0) 2(19,0)
  body extent -20,-10 20,10, height 20
C0603 [mm]
  rrect40% 0.74x1 smd: 1(-0.68,0) 2(0.68,0)
  body extent -0.8,-0.4 0.8,0.4, height 0.8
C0805 [mil]
  rrect50% 52x60 smd: 1(-37.4,0) 2(38,0)
  body extent -40,-30 40,30, height 35
C1206 [mm]
  rect 1.1x1.7 smd: 1(-1.325,0) 2(1.325,0)
  silkscreen extent -0.4,-0.75 0.4,0.75, body extent -1.68,-0.87 1.67,0.88, height 1.6
CAY16 [mil]
  rect 20x26 smd: 1(-47.24,-26.57) 2(-15.75,-26.57) 3(16,-26.57) 4(48,-26.57) 5(48,27) 6(16,27) 7(-15.75,27) 8(-47.24,27)
  body extent -61,-30 62,30, height 20
CON-Barrier-6-8.26mm [mil]
  oval 136x130 hole 76: 1(-812.5,160) 2(-487.5,160) 3(-162.5,160) 4(162.5,160) 5(487.5,160) 6(812.5,160)
  silkscreen extent -1007,-250 1008,250, body extent -1007,-250 1007,250, height 530
CRYS320250 [mil]
  rect 52x42 smd: 1(-45.28,-36.42) 2(46,-36.42) 3(46,37) 4(-45.28,37)
  silkscreen extent -63,-49 63,50, body extent -63,-49 63,50, height 28
DO-214AB [mil]
  rect 63x126 smd: A(119,0) C(-118.11,0)
  silkscreen extent -138,-128 138,128, body extent -140,-130 140,130, height 98
FIDUCIAL-1X2 [mil]
  rrect100% 40x40 smd paste-3897.64 mask+20: 1(0,0)
  body extent -20,-20 20,20, height 1
HDR2X5 [mm] "Connector; Header; 5x2 Position"
  rect 1.5x1.5 hole 0.9: 1(0,0)
  round 1.5 hole 0.9: 2(0,2.54) 3(2.54,0) 4(2.54,2.54) 5(5.08,0) 6(5.08,2.54) 7(7.62,0) 8(7.62,2.54) 9(10.16,0) 10(10.16,2.54)
  silkscreen extent -1.27,-1.27 11.43,3.81
L1806 [mm] "Chip Inductor, 2-Leads, Body 4.50x1.60mm, IPC Medium Density"
  rect 1.38x1.8 smd: 1(-2.06,0) 2(2.06,0)
  silkscreen extent -1,-0.8 1,0.8, body extent -2.35,-0.9 2.35,0.9, height 1.8
LED2012120 [mil]
  rect 48x48 smd: A(-41.34,0) C(42,0)
  silkscreen extent 0,-27 12,27, body extent -50,-25 50,25, height 28
MSTBV2 [mil]
  oval 82.5x165 hole 55: 1(-100,0) 2(100,0)
  silkscreen extent -225,-150 225,180
MSTBV4 [mil]
  oval 82.5x165 hole 55: 1(-300,0) 2(-100,0) 3(100,0) 4(300,0)
  silkscreen extent -425,-150 425,180, body extent -428,-153 428,183, height 472
MSTBV4-ThinSilk [mil]
  oval 82.5x165 hole 55: 1(-300,0) 2(-100,0) 3(100,0) 4(300,0)
  silkscreen extent -425,-150 425,180, body extent -428,-153 428,183, height 472
NCV8402AD-SOIC8 [mil]
  rect 24x60 smd: 1(-75,-108.27) 2(-25,-108.27) 3(25,-108.27) 4(75,-108.27) 5(25,109) 5(75,109) 7(-75,109) 7(-25,109)
  silkscreen extent -122,-75 95,75, body extent -98,-130 99,130, height 58
"NET TIE" [mil]
  rrect50% 46x63 smd: 1(-30,0) 2(30,0)
  Top lines w8: -30,0 30,0
  silkscreen extent -65,-40 65,40, body extent -53,-31 53,31, height 4
OSHW_8X150_NOTEXT [mil]
  silkscreen extent 0,0 167,150, body extent 0,2 168,148
PN61729 [mil]
  round 54 hole 38: 1(50,186) 2(-49.21,186) 3(-49.21,107) 4(50,107)
  round 130.5 hole 87: P$1(-236.22,0) P$2(237,0)
  body extent -237,-405 238,226, height 406
QFN32_050050 [mm]
  rrect80% 0.8x0.28 smd mask+0.05: 1(-2.4,1.753) 2(-2.4,1.27) 3(-2.4,0.762) 4(-2.4,0.254) 5(-2.4,-0.25) 6(-2.4,-0.75) 7(-2.4,-1.25) 8(-2.4,-1.75) 17(2.413,-1.75) 18(2.413,-1.25) 19(2.413,-0.75) 20(2.413,-0.25) 21(2.413,0.254) 22(2.413,0.762) 23(2.413,1.27) 24(2.413,1.753)
  rrect80% 0.28x0.8 smd mask+0.05: 9(-1.75,-2.4) 10(-1.25,-2.4) 11(-0.75,-2.4) 12(-0.25,-2.4) 13(0.254,-2.4) 14(0.762,-2.4) 15(1.27,-2.4) 16(1.753,-2.4) 25(1.753,2.413) 26(1.27,2.413) 27(0.762,2.413) 28(0.254,2.413) 29(-0.25,2.413) 30(-0.75,2.413) 31(-1.25,2.413) 32(-1.75,2.413)
  rect 3.48x3.48 smd paste-4 mask-4: 33(0,0)
  silkscreen extent -3.4,-2.54 2.54,2.6, body extent -2.84,-2.84 2.86,2.86, height 1
QFN36-50P500X600X900_HS-37N [mm] "QFN, 36-Leads, Body 5.00x6.00mm, Pitch 0.50mm, Thermal Pad 3.60x4.10mm, IPC Medium Density"
  oval 0.85x0.25 smd: 1(-2.425,2.25) 2(-2.425,1.75) 3(-2.425,1.25) 4(-2.425,0.75) 5(-2.425,0.25) 6(-2.425,-0.25) 7(-2.425,-0.75) 8(-2.425,-1.25) 9(-2.425,-1.75) 10(-2.425,-2.25) 19(2.425,-2.25) 20(2.425,-1.75) 21(2.425,-1.25) 22(2.425,-0.75) 23(2.425,-0.25) 24(2.425,0.25) 25(2.425,0.75) 26(2.425,1.25) 27(2.425,1.75) 28(2.425,2.25)
  oval 0.25x0.85 smd: 11(-1.75,-2.925) 12(-1.25,-2.925) 13(-0.75,-2.925) 14(-0.25,-2.925) 15(0.25,-2.925) 16(0.75,-2.925) 17(1.25,-2.925) 18(1.75,-2.925) 29(1.75,2.925) 30(1.25,2.925) 31(0.75,2.925) 32(0.25,2.925) 33(-0.25,2.925) 34(-0.75,2.925) 35(-1.25,2.925) 36(-1.75,2.925)
  rect 3.6x4.1 smd: 37(0,0)
  silkscreen extent -3.47,-3.2 2.7,3.2, body extent -2.55,-3.05 2.55,3.05, height 9
QSOP16 [mil]
  rect 15x50 smd: 1(-87.5,-102.36) 2(-62.5,-102.36) 3(-37.5,-102.36) 4(-12.5,-102.36) 5(13,-102.36) 6(38,-102.36) 7(63,-102.36) 8(88,-102.36) 9(88,103) 10(63,103) 11(38,103) 12(13,103) 13(-12.5,103) 14(-37.5,103) 15(-62.5,103) 16(-87.5,103)
  silkscreen extent -79,-56 -55,-32, body extent -95,-125 95,125, height 65
R0402 [mil]
  rrect40% 22x24 smd: 1(-18.9,0) 2(19,0)
  body extent -20,-10 20,10, height 14
R0603 [mm]
  rrect40% 0.74x1 smd: 1(-0.68,0) 2(0.68,0)
  body extent -0.8,-0.4 0.8,0.4, height 0.8
R1206 [mil]
  rrect50% 63x71 smd: 1(-55.98,0) 2(56,0)
  body extent -61,-31 61,31, height 24
SJ [mil]
  rrect50% 46x63 smd: 1(-30,0) 2(30,0)
  silkscreen extent -65,-40 65,40, body extent -53,-31 53,31, height 4
SMA-SM [mil]
  rect 79x79 smd: A(79,0) C(-78.74,0)
  silkscreen extent -89,-49 89,50, body extent -105,-54 105,55, height 116
SOD323-R [mil]
  rect 24x24 smd: A(44,0) C(-43.31,0)
  body extent -50,-31 50,31, height 28
SOD523 [mil]
  rect 28x20 smd: A(27.56,0) C(-27.56,0)
  body extent -30,-16 30,16, height 28
SOT669 [mil]
  rect 28x56 smd: 1(-75,-100.39) 2(-25,-100.39) 3(25,-100.39) 4(75,-100.39)
  rect 197x170 smd mask-200: MB(0,44)
  silkscreen extent -94,-77 95,-48, body extent -96,-120 97,128, height 43
TP1-27 [mil]
  rrect100% 50x50 smd: TP(0,0)
  body extent -25,-25 25,25, height 0
TQFP100_140140_012 [mil]
  rect 60x12 smd mask+4: 1(-314.96,237) 2(-314.96,217) 3(-314.96,197) 4(-314.96,178) 5(-314.96,158) 6(-314.96,138) 7(-314.96,119) 8(-314.96,99) 9(-314.96,79) 10(-314.96,60) 11(-314.96,40) 12(-314.96,20) 13(-314.96,0) 14(-314.96,-19.68) 15(-314.96,-39.37) 16(-314.96,-59.06) 17(-314.96,-78.74) 18(-314.96,-98.43) 19(-314.96,-118.11) 20(-314.96,-137.8) 21(-314.96,-157.48) 22(-314.96,-177.17) 23(-314.96,-196.85) 24(-314.96,-216.54) 25(-314.96,-236.22) 51(315,-236.22) 52(315,-216.54) 53(315,-196.85) 54(315,-177.17) 55(315,-157.48) 56(315,-137.8) 57(315,-118.11) 58(315,-98.43) 59(315,-78.74) 60(315,-59.06) 61(315,-39.37) 62(315,-19.68) 63(315,0) 64(315,20) 65(315,40) 66(315,60) 67(315,79) 68(315,99) 69(315,119) 70(315,138) 71(315,158) 72(315,178) 73(315,197) 74(315,217) 75(315,237)
  rect 12x60 smd mask+4: 26(-236.22,-314.96) 27(-216.54,-314.96) 28(-196.85,-314.96) 29(-177.17,-314.96) 30(-157.48,-314.96) 31(-137.8,-314.96) 32(-118.11,-314.96) 33(-98.43,-314.96) 34(-78.74,-314.96) 35(-59.06,-314.96) 36(-39.37,-314.96) 37(-19.69,-314.96) 38(0,-314.96) 39(20,-314.96) 40(40,-314.96) 41(60,-314.96) 42(79,-314.96) 43(99,-314.96) 44(119,-314.96) 45(138,-314.96) 46(158,-314.96) 47(178,-314.96) 48(197,-314.96) 49(217,-314.96) 50(237,-314.96) 76(237,315) 77(217,315) 78(197,315) 79(178,315) 80(158,315) 81(138,315) 82(119,315) 83(99,315) 84(79,315) 85(60,315) 86(40,315) 87(20,315) 88(0,315) 89(-19.69,315) 90(-39.37,315) 91(-59.06,315) 92(-78.74,315) 93(-98.43,315) 94(-118.11,315) 95(-137.8,315) 96(-157.48,315) 97(-177.17,315) 98(-196.85,315) 99(-216.54,315) 100(-236.22,315)
  silkscreen extent -276,-276 276,276, body extent -281,-281 281,281, height 47
VSSOP10 [mm] "TSSOP, 10-Leads, Body 3.15x3.00mm, Pitch 0.50mm, Thermal Pad 2.05.2x1.50.2mm, IPC High Density"
  rect 1.02x0.3 smd mask+0.102: 1(-2.4,1) 2(-2.4,0.5) 3(-2.4,0) 4(-2.4,-0.5) 5(-2.4,-1) 6(2.4,-1) 7(2.4,-0.5) 8(2.4,0) 9(2.4,0.5) 10(2.4,1)
  rrect50% 2.667x2.667 smd mask-1.905: 11(0,0)
  silkscreen extent -2.02,-1.7 0.65,1.82, body extent -1.55,-1.7 1.55,1.7, height 1.09
Wave_hole_3x7-singleSided [mil]
  round 0 hole 118.11 unplated paste+0 mask-112: 0(0,0)
  round 0 hole 15 paste-20 mask-20: 1(-100,0) 1(-70,-70) 1(-70,70) 1(0,-100) 1(0,100) 1(70,-70) 1(70,70) 1(100,0)
  round 60 smd paste-5 mask+0: 1(-94.49,-39.37) 1(-94.49,39.37) 1(-39.37,-94.49) 1(-39.37,94.49) 1(39.37,-94.49) 1(39.37,94.49) 1(94.49,-39.37) 1(94.49,39.37)
  Top circle w64.96: c0,0 r105
  Bottom circle w64.96: c0,0 r105
  body extent -105,-105 105,105
XAL50XX-153 [mm] "Precision Wire Wound Inductor, 2-Leads, Body 5.28x5.48mm, IPC High Density"
  rect 1.18x4.25 smd: 1(-1.655,0) 2(1.655,0)
  silkscreen extent -2.75,-2.85 2.75,2.85, body extent -2.74,-2.84 2.74,2.84, height 4.25

## Part data
C1 C12 C13 C57 C58: library part 04025A220JAT2A, "CAP CER 0402 22pF 50V 5% C0G"
C2 C45: library part C0805C106K8PACTU, "CAP CER 0805 10uF 10V 10% X5R"
C3 C17 C18 C23 C24 C25 C27 C28 C29 C32 C33 C34 C37 C38 C39 C40 C42 C43 C44 C60 C62 C71 C72 C73 C74 C84 C85 C86 C87 C88 C89: library part C0603C104K5RACTU, "CAP CER 0603 100nF 50V 10% X7R"
C4 C6 C7 C8 C9 C10 C11 C14 C15 C26 C52 C56 C59 C67 C68 C69 C70: library part GRM155R71C104KA88D, "CAP CER 0402 100nF 16V 10% X7R"
C5: library part UPW1H471MHD1TO, "CAP ALU 470uF 50V 20%"
C16 C19 C20 C21 C22 C47 C48: library part GRM155R60J105KE19D, "CAP CER 0402 1uF 6.3V 10% X5R"
C30: library part C1206C475K5PACTU, "CAP CER 1206 4.7uF 50V 10% X5R"
C31 C36 C41 C46: library part CC0603KRX7R7BB224, "CAP CER 0603 220nF 10V 10% X7R"
C35: library part GRM21BR71H105KA12L, "CAP CER 0805 1uF 50V 10% X7R"
C49 C63: library part CC0402KRX7R8BB472, "CAP CER 0402 4.7nF 25V 10% X7R"
C50 C51 C55 C61 C64 C65 C66 C75 C76 C77 C78 C79 C80 C81 C82 C83: library part C0603C102K5RACTU, "CAP CER 0603  1nF 50v 10% X7R"
C53 C54: library part UVZ1H101MPD1TD, "CAP ALU 100uF 50V 20% 105C"
D1 D3 D4 D5 D11 D13 D14 D15: "DIODE SOD523"
D2 D8: "DIODE TVS 30V SMA"
D6 D9 D10: library part SK310A, "DIODE Schottky 3A SMA"
D7: "DIODE DO-214AB"
D12: library part ZENER-DIODE, "Z-Diode"
D16: "DIODE TVS"
F1 F2 F3: "FUSE PTH ATO"
FB1 FB2: "FERRITE BEAD 1806 60ohm"
FID1 FID2 FID3: "Fiducial"
JP1: "SMD solder jumper"
L1: "IND 15uH 3.9A 20%"
L2: "IND 0805 10uH 240mA 20%"
LED1 LED4 LED10: "LED 0805 Yellow"
LED2 LED3 LED6 LED8: "LED 0805 Red"
LED7: "LED 0805 Green"
"Net Tie": "Net Tie"
P1 P2: "Header, 5-Pin, Dual row"
P3: library part "5X2 IDCw"
Q1 Q5: "Mosfet N-channel 60V 356A 117W 9.3mOhms"
R1 R2: library part RC0402FR-0722RL, "RES 0402 22r 62.5mW 1%"
R3: library part CRCW0402200KFKED, "RES 0402 22r 63mW 1%"
R4 R7 R8 R10 R14 R15 R19 R20: library part CRM1206-FX-R100ELF, "RES 1206 0.1r 0.5w 1%"
R5 R6 R31 R32 R36 R37: library part ERJ3EKF4701V, "RES 0603 4.7K 100mW 1%"
R9 R42 R56 R71: library part CRCW060310R0FKEA, "RES 0603 10r 100mW 1%"
R11 R23 R24 R46 R47 R73: library part ERJ-3EKF1002V, "RES 0603 10K 100mW 1%"
R13: library part RL2512FK-070R06L, "RES 0.06 OHM 1W 1% 2512 SMD"
R16 R21 R43 R57 R59 R60 R61 R62: library part RC0603FR-07100KL, "RES 100K OHM 1/10W 1% 0603 SMD"
R33 R34 R35: library part ERJ-3EKF1001V, "RES 0603 1K 100mW 1%"
R40 R58 R69 R70: library part RC0603JR-071K8L, "RES 0603 1.8K 100mW 5%"
R72: library part ERJ2GEJ105X, "RES 0402 1M 100mW 5%"
RN1 RN2 RN3: library part CAY16-103J4LF, "RES ARRAY 4 RES 10K 1206 62.5mW 5%"
RN5: library part CAY16-102J4LF, "RES ARRAY 4 RES 1K 1206 62.5mW 5%"
RV1 RV2: "VAR 0603 5V"
S1: "SWTCH Momentary Washable"
TP0 TP1 TP2 TP3 TP4 TP5 TP6 TP7 TP8 TP9 TP10 TP11 TP12 TP13 TP14 TP15 TP16 TP17 TP18 TP19 TP20 TP21 TP22 TP23 TP24 TP25 TP26 TP27 TP28 TP29 TP30 TP31 TP32 TP33 TP34 TP35 TP36 TP37 TP38 TP39 TP40 TP41 TP42 TP43 TP44 TP45 TP46 TP47 TP48 TP49 TP50 TP51 TP52 TP53 TP54 TP55 TP56 TP57 TP58 TP59 TP60 TP61 TP62 TP63 TP64 TP65 TP66 TP67 TP68 TP69 TP70 TP71 TP72: "Test Point"
U1: library part ATMEGA32U2-MU2
U2: library part ATMEGA2560AU
U3: library part LM25011, "REG BUCK"
U4: library part TMC2130-LA-T
U5 U6 U7 U8: library part A4982QFN32, "Stepper Driver - Fully Integrated, Control and Power Stage"
U10: "4ch iCoupler"
X1 X5 X7 X9 X11 X12 X21 X22 X23 X27 X28: "Connector 2pos 2.54mm locking"
X2: "USB connector B PTH"
X3 X10: library part MSTBV4, "PHOENIX"
X4 X6 X8 X14 X15: "PHOENIX CONNECTOR"
X13: "Conn - 5.08mm Pitch Fixed"
X17 X18: "PIN HEADER"
X35: "Connector 2x1 2.54mm PTH"
Y1 Y2: "Crystal 16mHz 10ppm 10pF"

## Free pads (board coordinates)
  round 80 hole 40: 0(5020.67,1405.51)

## Via types
v1: diameter 30, hole 15, Top to Bottom, tented both sides, 231 vias
v2: diameter 30, hole 15, Top to Bottom, 224 vias
v3: diameter 19.68, hole 7.87, Top to Bottom, 12 vias
v4: diameter 32, hole 15, Top to Bottom, tented both sides, 11 vias
v5: diameter 50, hole 28, Top to Bottom, tented both sides, 3 vias
v6: diameter 50, hole 30, Top to Bottom, 3 vias
v7: diameter 45, hole 25, Top to Bottom, tented both sides, 1 vias
v8: diameter 40, hole 20, Top to Bottom, 1 vias
v9: diameter 30, hole 15, Top to Bottom, tented top, 1 vias
v10: diameter 32, hole 15, Top to Bottom, 1 vias

## Nets (pads, with @x,y where several pads share a name; then routed paths per layer and width w, separated by ;. In a path a pad name is that pad's centre, name@x,y a point inside that pad or via, vN(x,y) a via of type N, cw(c..) or ccw(c..) an arc to the next point about the centre after c; other vN are vias at no path point)
+12V: C3.1 C5.1 C27.1 C29.1 C32.1 C34.1 C37.1 C39.1 C42.1 C44.1 C71.1 C72.1 C73.1 C74.1 D2.C F1.2 U5.3 U5.22 U6.3 U6.22 U7.3 U7.22 U8.3 U8.22 | length 6760.9
  Top w8: C71.1@1107.24,1638.03 C71.1@1115.22,1646.01 ; 1161.42,1646.01 U5.22@1192.4,1646.01 ; U5.3@1381.89,1646.01 1413.39,1646.01 ; C27.1@1412.06,1892.1 1412.06,1927.81 v2(1413.39,1929.13) ; C29.1@1463.58,1643.9 1471.26,1651.57 v9(1500.98,1651.57) ; v2@1525.59,1652.56 1554.33,1652.56 C72.1@1562.99,1643.9 ; C72.1@1555.12,1643.9 C72.1@1557.23,1646.01 ; 1614.17,1646.01 U6.22@1643.31,1646.01 ; U6.3@1832.8,1646.01 1866.14,1646.01 ; 2050.39,1644.88 2080.8,1644.88 U7.22@2081.93,1646.01 ; U7.3@2271.42,1646.01 2303.15,1646.01 ; C37.1@2298.23,1891.93 2319.88,1913.58 v2(2319.88,1918.31) ; C39.1@2366.93,1645.67 2381.89,1630.71 2381.89,1610.24 ; C74.1@2876.97,1643.9 2881.75,1639.12 U8.22@2969.96,1639.12 ; U8.3@3159.45,1639.12 3257.03,1639.12 C44.1@3261.81,1643.9
  Top w12: C42.1@3172.24,1892.1 3206.33,1892.1 v2(3208.66,1889.76)
  Top w20: C44.1@3261.81,1643.9 C44.1@3263.58,1645.67
  Top w24: C71.1@1107.24,1643.03 1110.22,1646.01 1115.22,1646.01 1161.42,1646.01 ; 1415.5,1643.9 C29.1@1463.58,1643.9 ; C72.1@1562.99,1643.9 1612.06,1643.9 ; 1866.14,1646.01 1908.32,1646.01 C34.1@1909.45,1644.88 ; C73.1@2003.94,1644.88 2050.39,1644.88 ; 2303.15,1646.01 2303.49,1645.67 C39.1@2366.93,1645.67
  Top w25: C44.1@3263.58,1645.67 v2(3326.77,1645.67)
  Top w50: D2.C@3385.83,1409.45 3412.51,1382.76 3412.51,1350.76 3419.49,1343.78 C3.1@3419.49,1323.82
  Supply w8: v2(1413.39,1929.13) 1500.98,1841.54 v9(1500.98,1651.57) ; v2(1854.33,1917.32) 1862.01,1917.32 1944.88,1834.45 v2(1944.88,1649.61) ; v2(2319.88,1918.31) 2381.89,1856.3 2381.89,1610.24 ; v2(3208.66,1889.76) 3279.34,1889.76 3320,1849.1 3320,1695 3335.15,1679.85 v2@3335.15,1654.05
  Supply w50: v2@1078.24,1673.23 1078.24,1584.66 1072.09,1578.52 1072.09,1396.82 1124.91,1344 1515.75,1344 1515.75,1637.8 ; 1956.94,1354.39 1956.94,1625.98 ; v2(2397.64,1606.3) 2421,1582.94 2421,1287.53 2429,1279.53 ; v2(2838.58,1590.55) 2838.58,1484.71 2849.8,1473.5 2849.8,1280.13 2850.39,1279.53 ; v2@3335.15,1645.67 3335.15,1594.49 3370.82,1558.82 3370.82,1284.2 3366.14,1279.53
  Supply w130: 1515.75,1344 1518.75,1347 1919,1347 1929,1337 2036.89,1337
  Supply w140: 1956.94,1354.39 1957.83,1355.28 1973.11,1340 2185.11,1340 2245.58,1279.53 2429,1279.53 2850.39,1279.53 2911.19,1340.32 3289.57,1340.32 3350.36,1279.53 3366.14,1279.53
  other v1: 3326.77,1621.06 1500.98,1622.05 1531.5,1622.05 1070.87,1649.61
  other v2: 2866.14,1590.55 1972.44,1649.61 1531.5,1652.56 1082.68,1673.23
+12V2: C30.1 C35.1 C53.1 C60.1 D6.C D8.C F2.2 R3.2 R40.2 R69.2 R70.2 R73.2 TP3.TP TP33.TP U3.1 X3.3 X9.2 X35.1 | length 2906.3
  Top w8: R73.2@3192.13,2877.96 3194.09,2879.92 v2(3224.41,2879.92) ; v4(3505.91,2608.27) 3519.68,2594.49 3674.41,2594.49 X9.2@3705.91,2562.99 ; C35.1@4365,3322.17 4383.17,3322.17 4380,3325.33 4380,3363 R3.2@4388,3371
  Top w12: U3.1@4289.17,3337.2 4333.17,3337.2 C35.1@4342.32,3328.05
  Top w16: C60.1@6411.42,1232.48 6492.91,1232.48 D8.C@6507.87,1217.52
  Top w20: D6.C@3816.93,2002.95 D6.C@3831.89,2017.92 ; v5@3879.92,2017.92 R40.2@3923.23,2017.92
  Top w24: D6.C@3831.89,2017.92 v5@3879.92,2017.92 ; v5(4246,3216) 4246,3217.83 C30.1@4287.17,3259 4307.17,3279 4332.6,3279 C35.1@4365,3311.4
  Top w40: D8.C@6511.81,1207.68 D8.C@6531.5,1227.36
  Supply w8: v2(3224.41,2879.92) 3236.63,2867.7 3619.67,2867.7 3631.89,2879.92 3633.86,2877.95
  Supply w24: X9.2@3705.91,2562.99 3702.76,2562.99 3633.86,2631.89 3633.86,2877.95 3633.86,2955.71 3771.15,3093 4118,3093 4135,3110 4135,3140 4211,3216 v5(4246,3216)
  Supply w40: X35.1@3700.79,2791.34 3705.91,2786.22 X9.2@3705.91,2562.99
  Supply w50: v5(3879.92,2018.7) 3962.6,1936.02
  Supply w80: X9.2@3705.91,2524.1 X9.2@3705.91,2562.99
  Bottom w7: TP3.TP@4800,3100 4921,3100
  Bottom w8: 4921.26,3062.32 4921.26,3096.06
+12V3: C54.1 C62.1 D7.C D10.C F3.2 R58.2 TP16.TP X3.1 | length 121
  Bottom w7: TP16.TP@4800,2700 4921,2700
  other v2: 4833.66,2625 4891.08,2625 4948.49,2625 5005.91,2625 4854.33,2767.72 4905.51,2767.72 4956.69,2767.72 5007.87,2767.72
AREF: C6.1 U2.98 | length 84.4
  Top w8: U2.98@2931.79,2716.85 3004.61,2716.85 C6.1@3012.8,2708.66
BED-HEAT: R56.1 R57.1 U2.1 | length 1543.8
  Top w8: U2.1@2853.79,2834.96 2898.97,2834.96 3023.08,2959.07 3324.8,2959.07 3467.95,2815.92 3467.95,2511.38 3487.34,2491.99 3974.28,2491.99
BED-IN: C88.1 C89.1 F3.1 TP68.TP X10.1 | length 245.4
  Top w24: C88.1@6188.98,621.26 C89.1@6247.05,621.26 6247.05,793.31 v1(6257.87,804.13)
  other v1: 4999.02,527.56 5080.71,527.56
D+: R2.1 RV2.2 TP28.TP X2.3 | length 347.2
  Top w8: v1(1472,2715) R2.1@1596.1,2715
  Bottom w8: X2.3@1366.84,2568.9 1366.84,2666.84 TP28.TP@1400,2700 1457,2700 v1(1472,2715)
D-: R1.1 RV1.2 TP27.TP X2.2 | length 209.3
  Top w8: v1(1500,2643) 1518.77,2661.77 RV1.2@1545,2661.77 ; RV1.2@1545,2660 R1.1@1596.1,2660
  Bottom w8: X2.2@1445.84,2568.9 TP27.TP@1500,2600 v1(1500,2643)
DTR: JP1.1 JP1.2 RN5.5 TP24.TP U1.13 U10.3 | length 963
  Top w8: v2(1811.02,2917.32) 1847.24,2917.32 RN5.5@1872.28,2892.29 ; v2(1840,2330) 1857.54,2347.54 U10.3@1889.76,2347.54 ; U1.13@1874.49,2720 1911.93,2720 v2(1912.4,2720.47)
  Bottom w8: TP24.TP@1800,2300 v2(1840,2330) 1840,2431 1863.19,2454.19 JP1.2@1863.19,2819.41 ; v2(1811.02,2917.32) 1848.94,2879.41 JP1.1@1863.19,2879.41 JP1.2@1863.19,2819.41 ; v2(1912.4,2720.47) 1912.4,2770.2 JP1.2@1863.19,2819.41
E0-DIR: TP11.TP U2.41 U8.20 | length 1476.2
  Top w7: 2348.25,2461.44 2350.3,2463.49 2425.11,2463.49 v2(2444.88,2483.27)
  Top w8: U2.41@2301.83,2460 2346.81,2460 2348.25,2461.44 ; v1(2750,2000) 2800,1950 2800,1734.1 2861.28,1672.82 2927.54,1672.82 2933.68,1678.96 U8.20@2969.96,1678.96
  Bottom w7: 2377.66,2428.84 2377.66,2444.23 2416.69,2483.27 v2(2444.88,2483.27)
  Bottom w8: 2377.66,2428.84 2377.66,2189.37 2536.23,2030.8 2688.33,2030.8 2719.13,2000 v1(2750,2000) TP11.TP@2800,2000
E0-EN: R62.2 TP14.TP U2.74 U8.5 | length 1040.3
  Top w7: v1(3166.34,1951.77) 3285.08,1951.77 3317.94,1918.9 3317.94,1878.94 R62.2@3277.56,1838.55
  Top w8: U2.74@2833.79,2205 2833.79,2115.03 2897.82,2051 2970.21,2051 2984.21,2037 v1(3063,2037) ; U8.5@3159.45,1678.96 3197.23,1678.96 3204.37,1671.82 3265.1,1671.82 3295.28,1702 R62.2@3295.28,1838.55
  Bottom w7: TP14.TP@3100,2000 3148.23,1951.77 v1(3166.34,1951.77)
  Bottom w8: v1(3063,2037) TP14.TP@3100,2000
E0-MS1: U2.86 U8.11 | length 862
  Top w7: 3113.71,1938.46 3151,1975.75 3151,2021.12
  Top w8: U2.86@2931.79,2480 2969.8,2480 2990.79,2459.01 2990.79,2453.28 3082.68,2361.4 3082.68,2089.45 3151,2021.12 ; U8.11@3094.49,1763.61 3094.49,1811.41 3083.47,1822.43 3083.47,1908.22 3113.71,1938.46